# Altium PCB Led Strip 5730 - 100mm.PcbDoc
Units mm, origin at the board's own origin, x right, y up, seen from the top; angles counter-clockwise.
Board outline 152.4 x 101.6 mm, 2 copper layers (Top Layer, Bottom Layer); 44 components, 54 nets, 121 pads, 0 vias.
Unrouted connection lines stored in the file: 30.
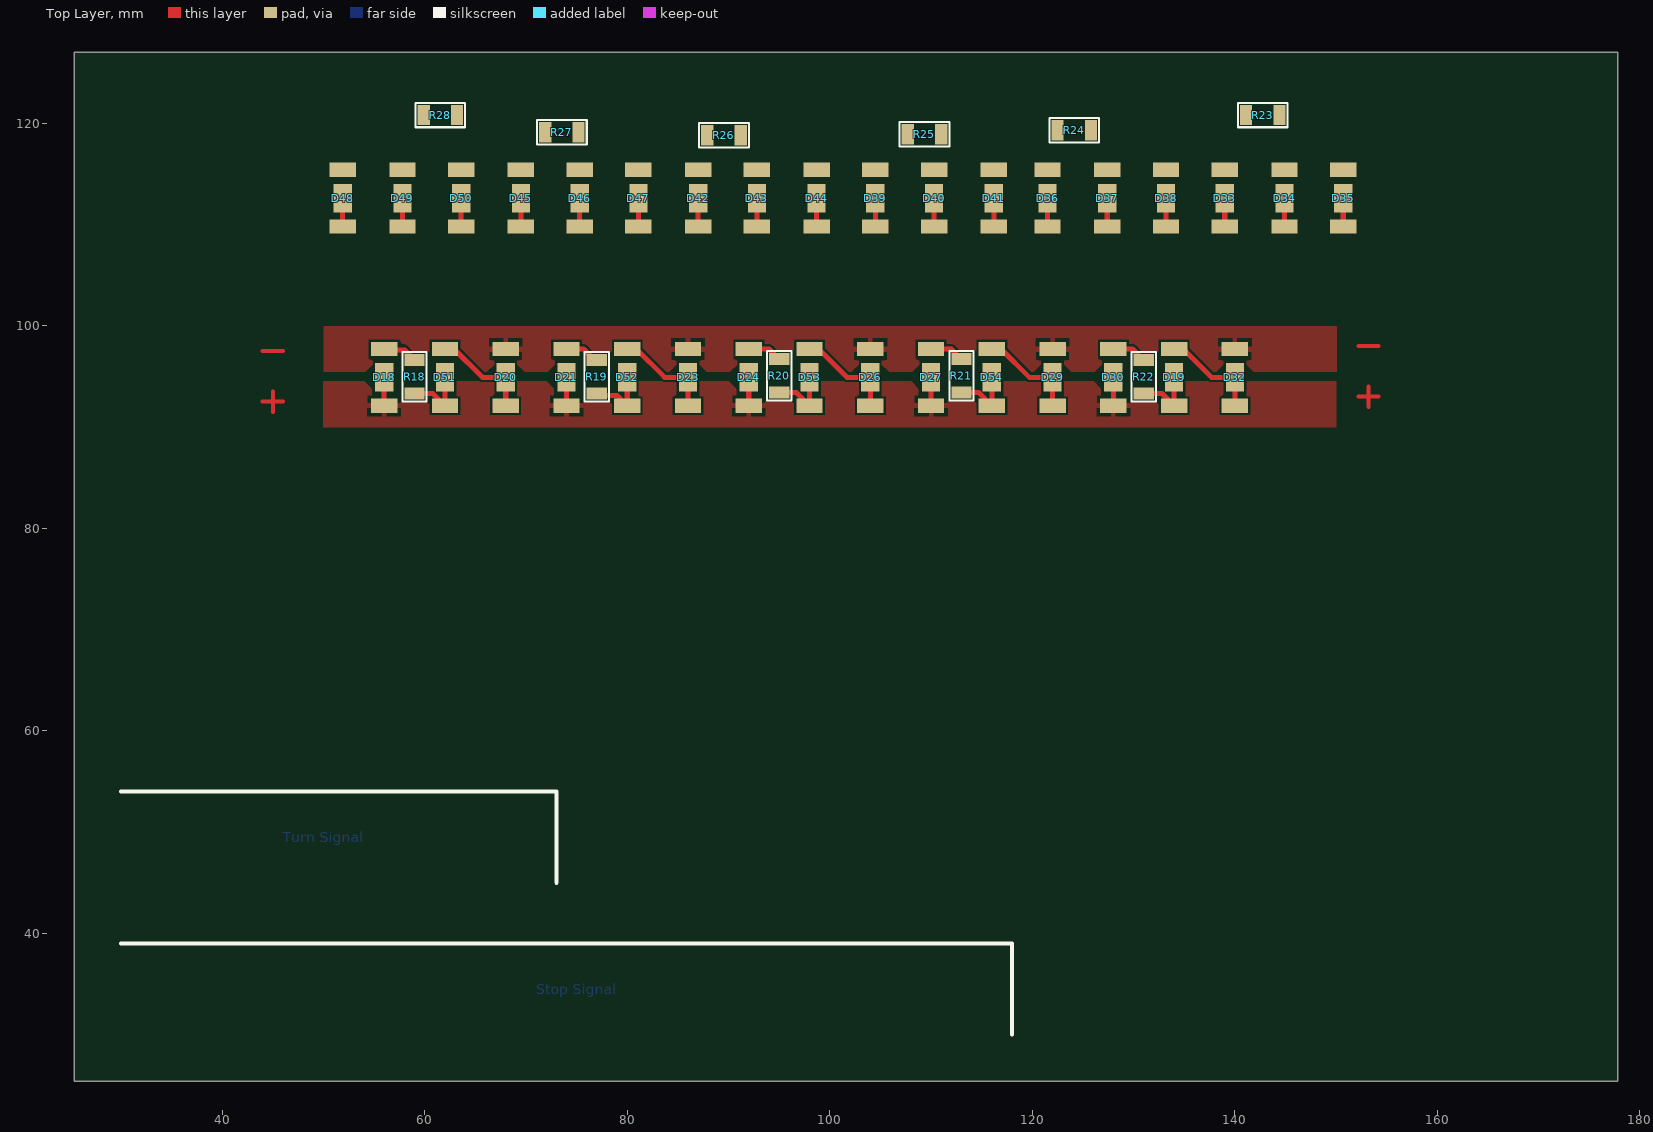
[diagram p0: Top Layer view]
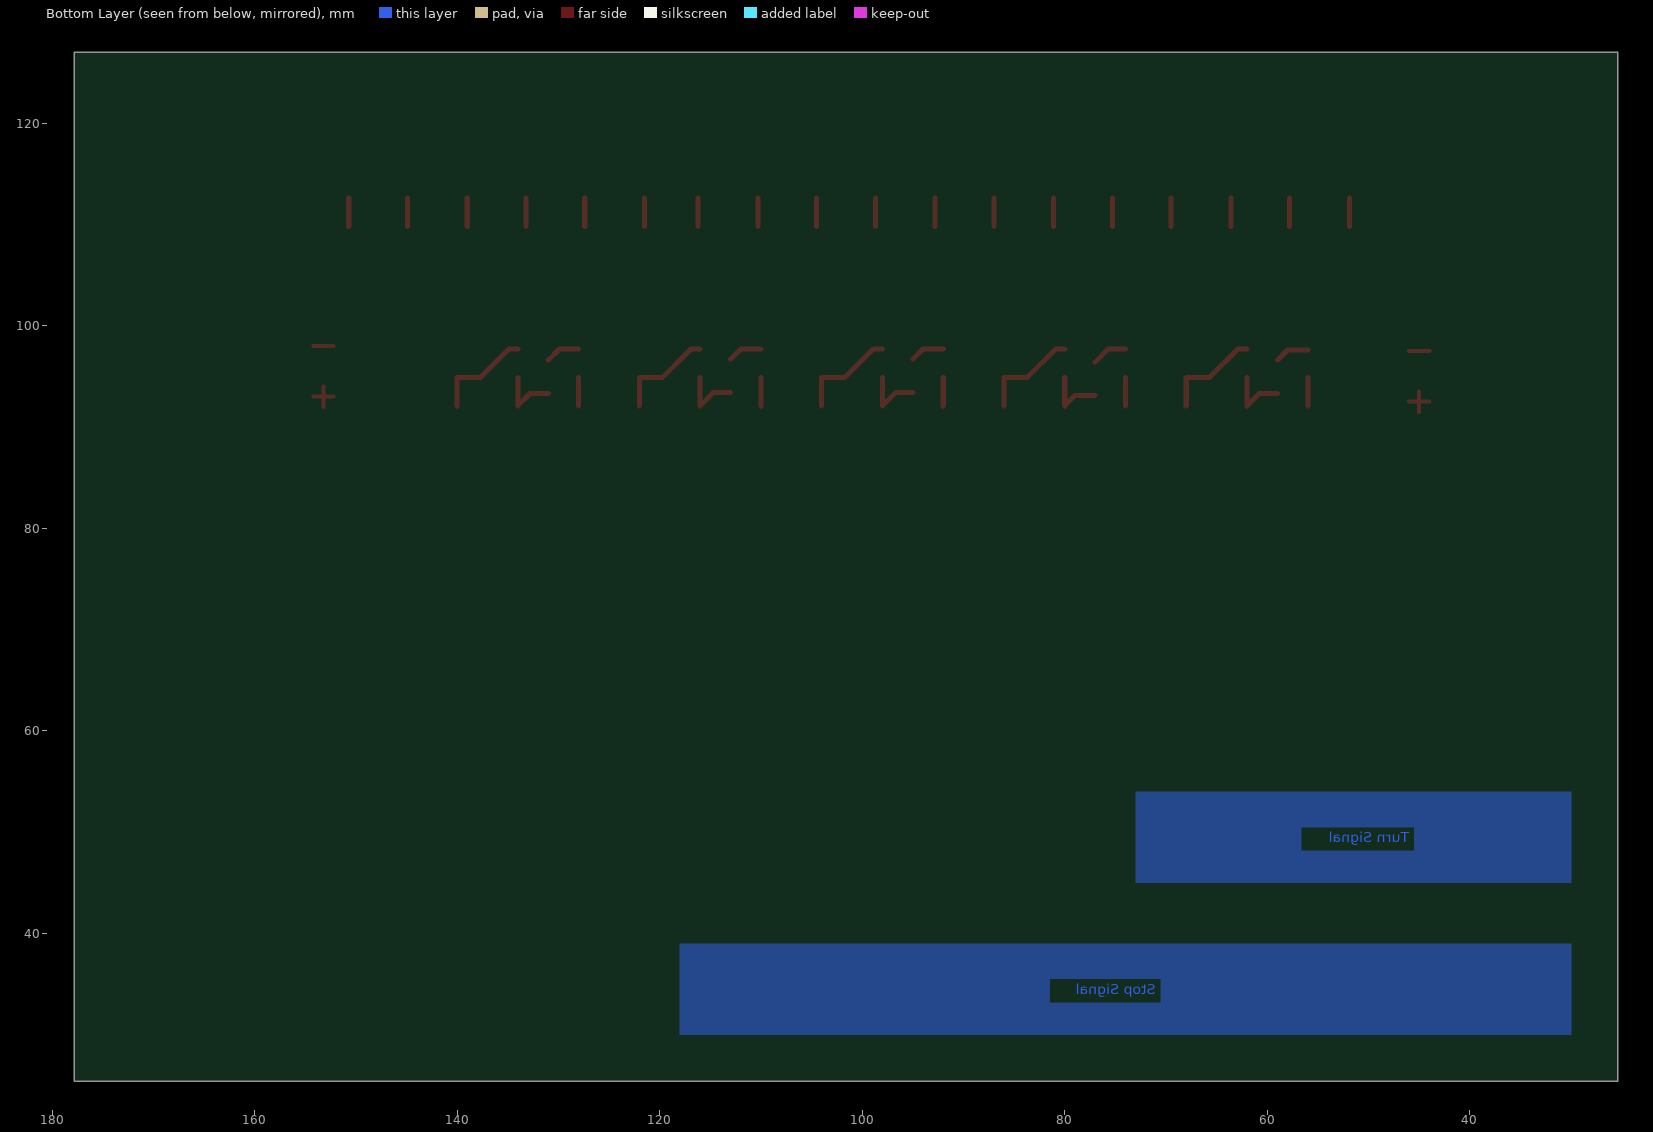
[diagram p1: Bottom Layer view, seen from below]
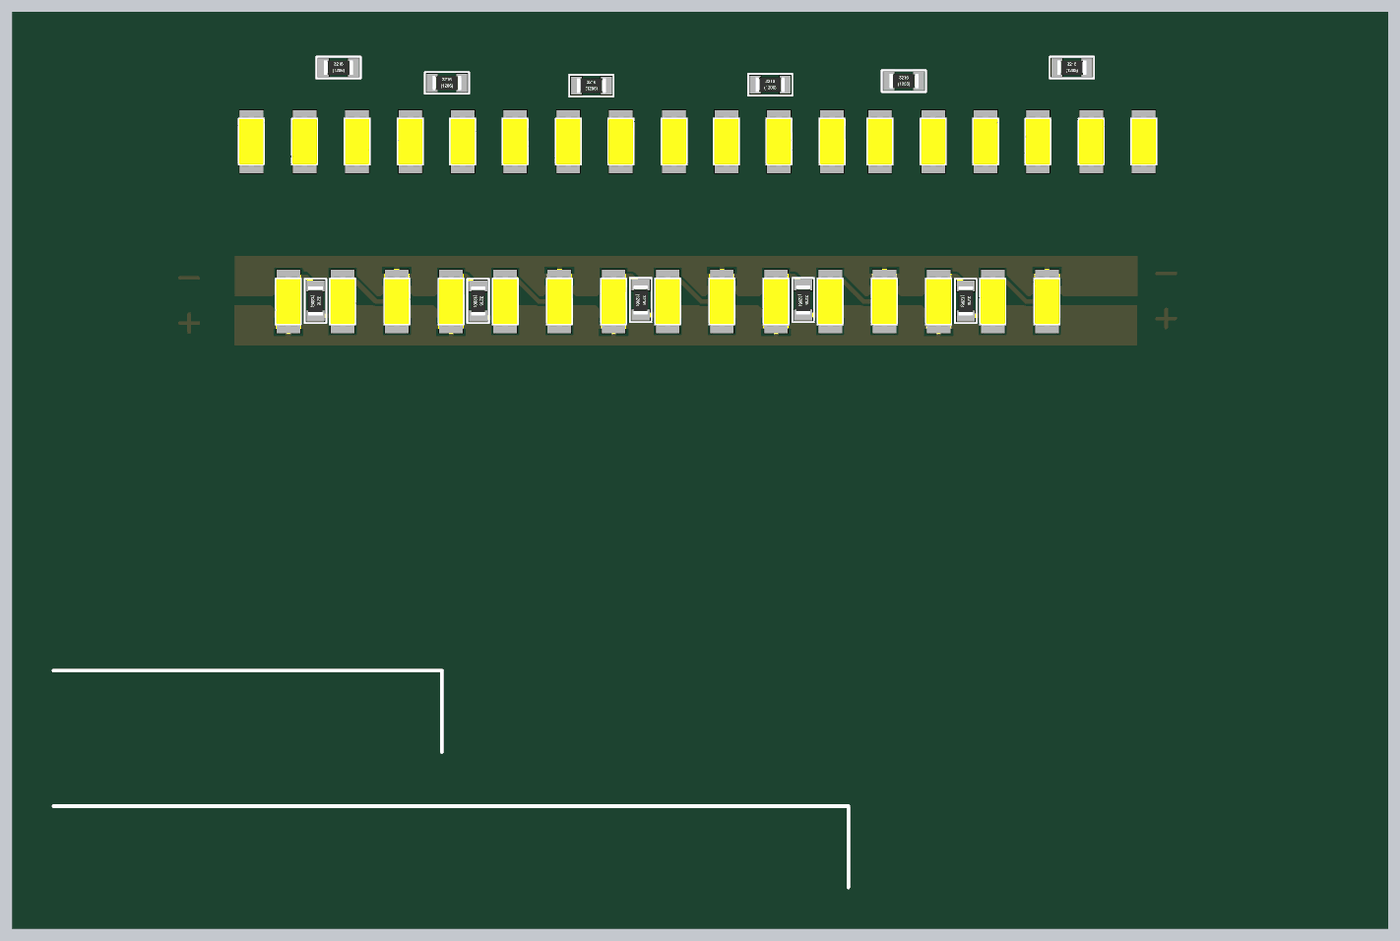
[diagram p2: 3D render of the assembled board from above, using the file's embedded part models]

## Layer stack, top to bottom
Top Solder: solder mask 0.0102, Solder Resist, Dk 3.5
Top Layer: signal copper 0.0356
Dielectric 1: dielectric 0.32, FR-4, Dk 4.8
Bottom Layer: signal copper 0.0356
Bottom Solder: solder mask 0.0102, Solder Resist, Dk 3.5

## Board outline
25.4,25.4 177.8,25.4 177.8,127 25.4,127

## Design rules (kind name [scope] priority, off if disabled: settings)
Clearance [All] p1: gap=0.254
PlaneClearance [All] p1: clearance=0.35
PlaneConnect [All] p1: planeconnectstyle=Relief reliefexpansion=0.508 reliefentries=4 reliefconductorwidth=0.5 reliefairgap=0.35
PolygonConnect [All] p1: connectstyle=Relief reliefconductorwidth=0.5 reliefentries=4 polygonreliefangle="90 Angle" airgapwidth=0.35
RoutingVias [All] p1: holewidth=0.711 width=1.27 viastyle="Through Hole" minholewidth=0.711 minwidth=1.27 maxholewidth=0.711 maxwidth=1.27
SolderMaskExpansion [All] p1: expansion=0.102
Width [All] p1: maxlimit=5 minlimit=0.2 preferedwidth=0.5
27 further rules are at their usual default settings.

## Components (designator, comment, footprint, x,y, rotation, side; value= is the part's Value field where it differs from the comment)
D18 "Warm White" "LED SMD 5730 White" 56,92.1 r90 top
D19 "Warm White" "LED SMD 5730 White" 134,92.1 r90 top
D20 "Warm White" "LED SMD 5730 White" 68,92.1 r90 top
D21 "Warm White" "LED SMD 5730 White" 74,92.1 r90 top
D23 "Warm White" "LED SMD 5730 White" 86,92.1 r90 top
D24 "Warm White" "LED SMD 5730 White" 92,92.1 r90 top
D26 "Warm White" "LED SMD 5730 White" 104,92.1 r90 top
D27 "Warm White" "LED SMD 5730 White" 110,92.1 r90 top
D29 "Warm White" "LED SMD 5730 White" 122,92.1 r90 top
D30 "Warm White" "LED SMD 5730 White" 128,92.1 r90 top
D32 "Warm White" "LED SMD 5730 White" 140,92.1 r90 top
D33 "Warm White" "LED SMD 5730 White" 138.999,109.8 r90 top
D34 "Warm White" "LED SMD 5730 White" 144.899,109.8 r90 top
D35 "Warm White" "LED SMD 5730 White" 150.699,109.8 r90 top
D36 "Warm White" "LED SMD 5730 White" 121.5,109.8 r90 top
D37 "Warm White" "LED SMD 5730 White" 127.399,109.8 r90 top
D38 "Warm White" "LED SMD 5730 White" 133.199,109.8 r90 top
D39 "Warm White" "LED SMD 5730 White" 104.5,109.8 r90 top
D40 "Warm White" "LED SMD 5730 White" 110.3,109.8 r90 top
D41 "Warm White" "LED SMD 5730 White" 116.2,109.8 r90 top
D42 "Warm White" "LED SMD 5730 White" 87,109.8 r90 top
D43 "Warm White" "LED SMD 5730 White" 92.8,109.8 r90 top
D44 "Warm White" "LED SMD 5730 White" 98.7,109.8 r90 top
D45 "Warm White" "LED SMD 5730 White" 69.5,109.8 r90 top
D46 "Warm White" "LED SMD 5730 White" 75.3,109.8 r90 top
D47 "Warm White" "LED SMD 5730 White" 81.1,109.8 r90 top
D48 "Warm White" "LED SMD 5730 White" 51.9,109.8 r90 top
D49 "Warm White" "LED SMD 5730 White" 57.8,109.8 r90 top
D50 "Warm White" "LED SMD 5730 White" 63.6,109.8 r90 top
D51 "Warm White" "LED SMD 5730 White" 62,92.1 r90 top
D52 "Warm White" "LED SMD 5730 White" 80,92.1 r90 top
D53 "Warm White" "LED SMD 5730 White" 98,92.1 r90 top
D54 "Warm White" "LED SMD 5730 White" 116,92.1 r90 top
R18 "Om" "SMD 1206 (3216)" 59,96.6 r270 top
R19 "Om" "SMD 1206 (3216)" 77,96.6 r270 top
R20 "Om" "SMD 1206 (3216)" 95,96.7 r270 top
R21 "Om" "SMD 1206 (3216)" 113,96.7 r270 top
R22 "Om" "SMD 1206 (3216)" 131,96.6 r270 top
R23 "Om" "SMD 1206 (3216)" 141.1,120.8 r0 top
R24 "Om" "SMD 1206 (3216)" 122.5,119.3 r0 top
R25 "Om" "SMD 1206 (3216)" 107.7,118.9 r0 top
R26 "Om" "SMD 1206 (3216)" 87.9,118.8 r0 top
R27 "Om" "SMD 1206 (3216)" 71.9,119.1 r0 top
R28 "Om" "SMD 1206 (3216)" 59.9,120.8 r0 top

## Footprints (in the part's own frame and the unit in brackets; to place one, negate y for a bottom-side part, rotate by r counter-clockwise, add the part's x,y. Pads: shape width x height; smd on the part's side, far side on the other; paste and mask are expansions set on the pad)
"LED SMD 5730 White" [mm]
  rect 1.4x2.6 smd: A(0,0) K(5.6,0)
  rect 2.8x1.8 smd: A(2.8,0)
  Top Layer lines w0.5: 0,0 2.8,0
  body extent 0,-1.5 5.6,1.5, height 0.86
"SMD 1206 (3216)" [mm]
  rect 1.2x2 smd: 1(0,0) 2(3.3,0)
  silkscreen extent -0.8,-1.2 4.1,1.2, body extent 0.05,-0.8 3.25,0.8, height 0.55

## Part data
D18 D19 D20 D21 D23 D24 D26 D27 D29 D30 D32 D33 D34 D35 D36 D37 D38 D39 D40 D41 D42 D43 D44 D45 D46 D47 D48 D49 D50 D51 D52 D53 D54: library part "Led SMD White Warm", "?3v ?20mA"
R18 R19 R20 R21 R22 R23 R24 R25 R26 R27 R28: library part "Res SMD 1206"

## Nets (pads, with @x,y where several pads share a name; then routed paths per layer and width w, separated by ;. In a path a pad name is that pad's centre, name@x,y a point inside that pad or via, vN(x,y) a via of type N, cw(c..) or ccw(c..) an arc to the next point about the centre after c; other vN are vias at no path point)
GND: D20.K D23.K D26.K D29.K D32.K D35.K D38.K D41.K D44.K D47.K D50.K
NetD1_A: 
NetD2_A: 
NetD3_A: 
NetD4_A: 
NetD5_A: 
NetD6_A: 
NetD7_A: 
NetD8_A: 
NetD9_A: 
NetD10_A: 
NetD11_A: 
NetD12_A: 
NetD13_A: 
NetD14_A: 
NetD15_A: 
NetD16_A: 
NetD17_A: 
NetD18_K: D18.K R18.1 | length 3.4
  Top Layer w0.5: D18.K@56,97.6 58,97.6 R18.1
NetD19_A: D19.A R22.2 | length 3.5
  Top Layer w0.5: R22.2 132.8,93.3 D19.A@134,92.1
NetD19_K: D19.K D32.A | length 7.2
  Top Layer w0.5: D19.K 134.9,97.7 137.7,94.9 D32.A@140,94.9
NetD20_A: D20.A D51.K | length 7.2
  Top Layer w0.5: D51.K 62.9,97.7 65.7,94.9 D20.A@68,94.9
NetD21_K: D21.K R19.1 | length 3.5
  Top Layer w0.5: D21.K 75.7,97.7 R19.1@77,96.4
NetD23_A: D23.A D52.K | length 7.2
  Top Layer w0.5: D52.K 80.9,97.7 83.7,94.9 D23.A@86,94.9
NetD24_K: D24.K R20.1 | length 3.4
  Top Layer w0.5: D24.K 94,97.7 R20.1
NetD26_A: D26.A D53.K | length 7.2
  Top Layer w0.5: D53.K 98.9,97.7 101.7,94.9 D26.A@104,94.9
NetD27_K: D27.K R21.1 | length 3.4
  Top Layer w0.5: D27.K 112,97.7 R21.1
NetD29_A: D29.A D54.K | length 7.2
  Top Layer w0.5: D54.K 116.9,97.7 119.7,94.9 D29.A@122,94.9
NetD30_K: D30.K R22.1 | length 3.5
  Top Layer w0.5: D30.K 129.9,97.7 R22.1
NetD33_K: D33.K R23.1
NetD34_A: D34.A R23.2
NetD34_K: D34.K D35.A
NetD36_K: D36.K R24.1
NetD37_A: D37.A R24.2
NetD37_K: D37.K D38.A
NetD39_K: D39.K R25.1
NetD40_A: D40.A R25.2
NetD40_K: D40.K D41.A
NetD42_K: D42.K R26.1
NetD43_A: D43.A R26.2
NetD43_K: D43.K D44.A
NetD45_K: D45.K R27.1
NetD46_A: D46.A R27.2
NetD46_K: D46.K D47.A
NetD48_K: D48.K R28.1
NetD49_A: D49.A R28.2
NetD49_K: D49.K D50.A
NetD51_A: D51.A R18.2 | length 3.5
  Top Layer w0.5: R18.2 60.8,93.3 D51.A@62,92.1
NetD52_A: D52.A R19.2 | length 3.4
  Top Layer w0.5: R19.2@77,93.1 79,93.1 D52.A@80,92.1
NetD53_A: D53.A R20.2 | length 3.5
  Top Layer w0.5: R20.2 96.7,93.4 D53.A@98,92.1
NetD54_A: D54.A R21.2 | length 3.5
  Top Layer w0.5: R21.2 114.7,93.4 D54.A@116,92.1
VCC: D18.A D21.A D24.A D27.A D30.A D33.A D36.A D39.A D42.A D45.A D48.A
VCC1: 
VCC2: 
copper on no net: | length 12
  Top Layer w0.4: 44,92.5 46,92.5 ; 44,97.5 46,97.5 ; 45,91.5 45,93.5 ; 152.2,93 154.2,93 ; 152.2,98 154.2,98 ; 153.2,92 153.2,94

## Polygon pours and split planes (outlines as drawn)
VCC on Top Layer "Top Layer-No Net" (solid, remove dead copper, pour order 7): 50,90 50,94.5 150,94.5 150,90 50,90
GND on Top Layer "Top Layer-No Net" (solid, pour order 5): 50.054,99.946 150.054,99.946 150.054,95.446 50.054,95.446 50.054,99.946
no net on Bottom Layer "Top Layer-No Net" (solid, pour order 6): 30,54 73,54 73,45 30,45
no net on Bottom Layer "Top Layer-No Net" (solid, pour order 8): 30,39 118,39 118,30 30,30

## Other copper
Bottom Layer:
  text "Turn Signal" at 46,49 h1
  text "Stop Signal" at 71,34 h1

## Silkscreen, mask and mechanical layers (free items; w line width, h text height)
Top Overlay:
  lines w0.4: 30,39 118,39 118,30 ; 30,54 73,54 73,45